# Altium PCB PCB_RX.PcbDoc
Units mil, origin at the board's own origin, x right, y up, seen from the top; angles counter-clockwise.
Board outline 3346.46 x 2149.63 mil, 2 copper layers (Top Layer, Bottom Layer); 88 components, 53 nets, 289 pads, 80 vias.
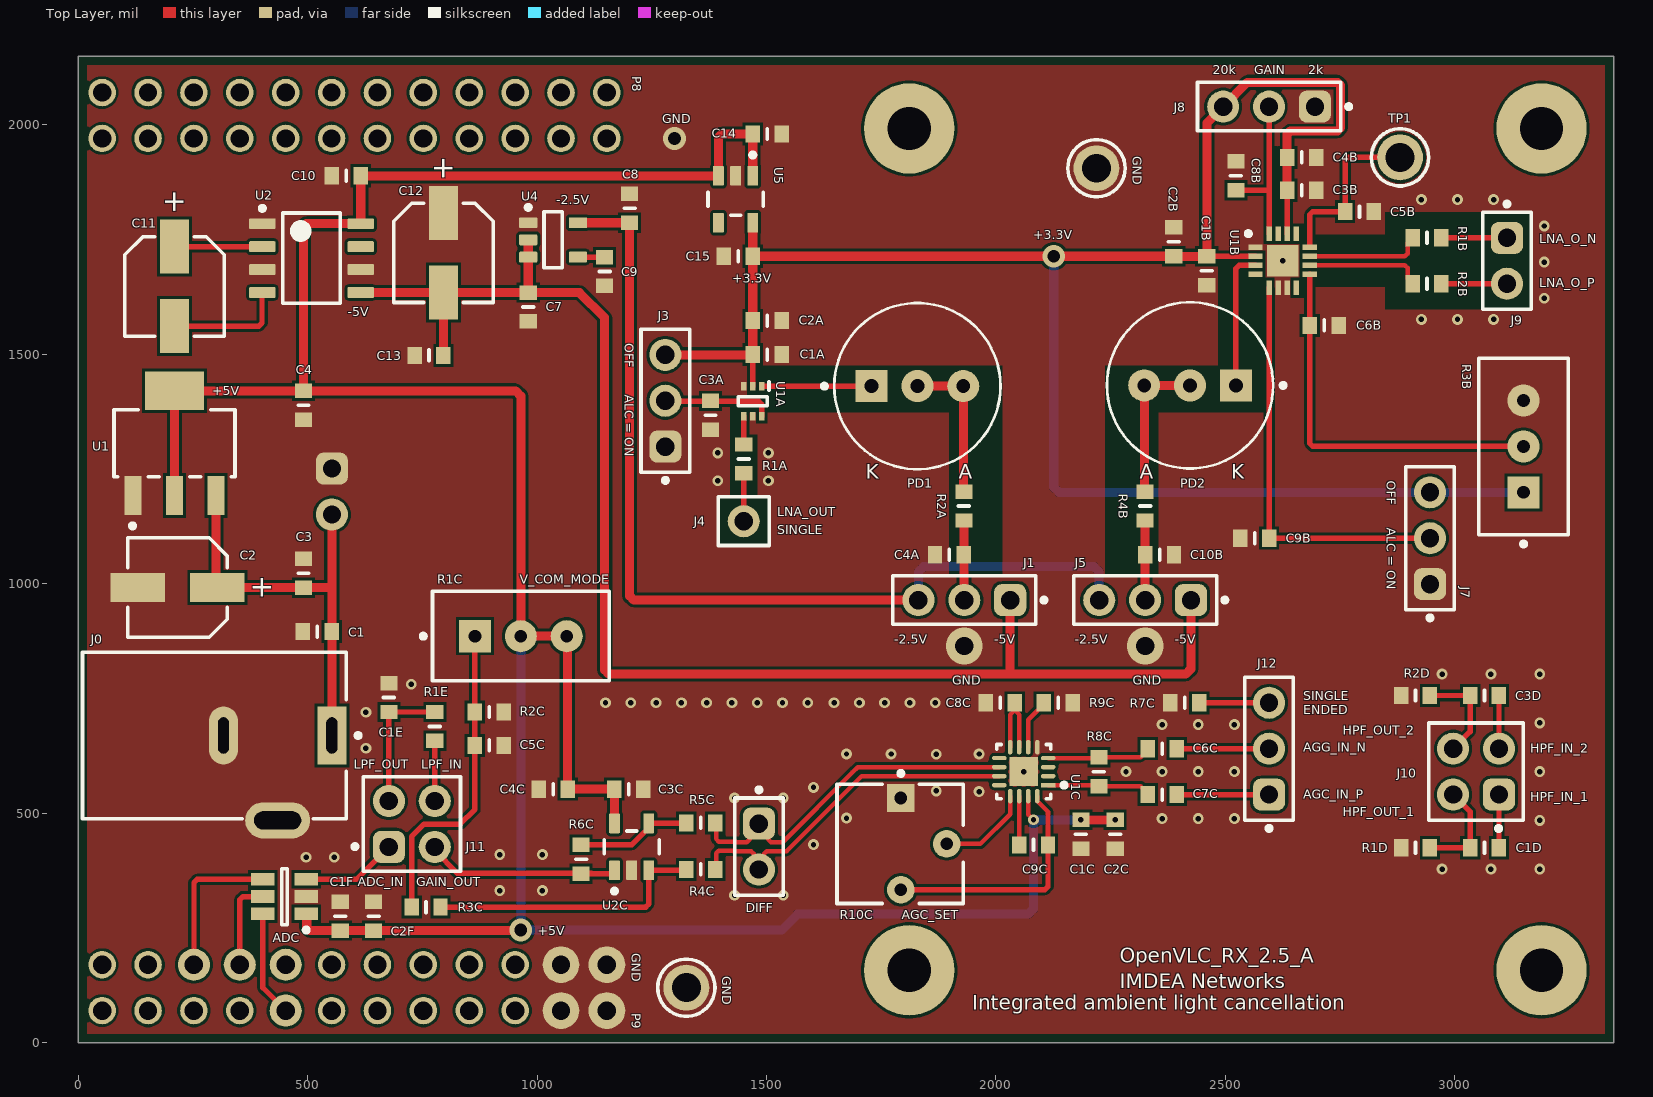
[diagram p0: Top Layer view]
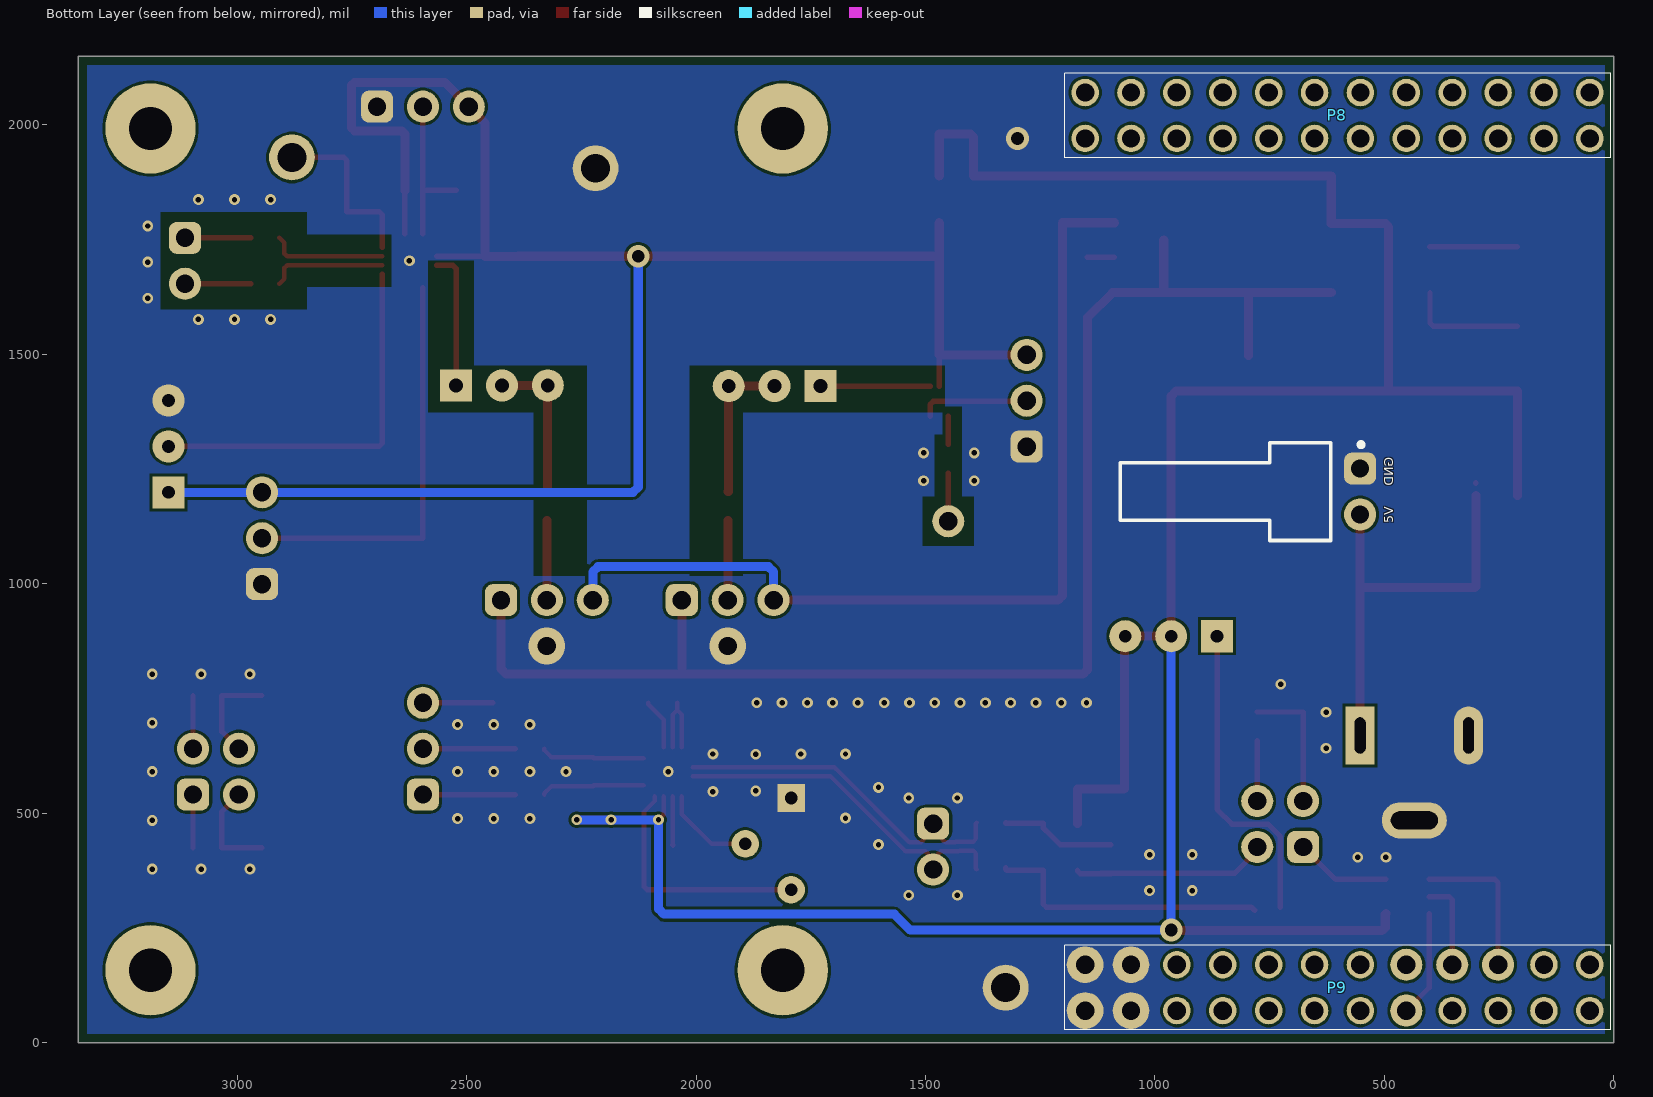
[diagram p1: Bottom Layer view, seen from below]

## Layer stack, top to bottom
Top Solder: solder mask 0.4, Solder Resist, Dk 3.5
Top Layer: signal copper 1.4
Dielectric1: dielectric 12.6, FR-4, Dk 4.8
Bottom Layer: signal copper 1.4
Bottom Solder: solder mask 0.4, Solder Resist, Dk 3.5

## Board outline
0,-0.02 3346.46,-0.02 3346.46,2149.61 0,2149.61

## Design rules (kind name [scope] priority, off if disabled: settings)
Clearance Clearance_1 [(InNet('GND') AND InComponent('DC-DC'))] p1: gap=19.68 ignorepadtopadclearanceinfootprint=FALSE except(0: Arc-Hole Track-Hole SMDPad-Hole THPad-Hole Via-Hole Fill-Hole Poly-Hole Region-Hole Text-Hole)
Clearance [All] p2: gap=5.91 ignorepadtopadclearanceinfootprint=FALSE except(0: Arc-Hole Track-Hole SMDPad-Hole THPad-Hole Via-Hole Fill-Hole Poly-Hole Region-Hole Text-Hole)
DiffPairsRouting [All] p1: maxlimit=11.81 minlimit=9.84 mostfreqgap=11.81 toplayer_prefgap=9.84 toplayer_minwidth=5.91 toplayer_maxwidth=15 toplayer_prefwidth=15 bottomlayer_minwidth=5.91 bottomlayer_maxwidth=15 bottomlayer_prefwidth=15 maxuncoupledlength=500
HoleSize [All] p1: absolutevalues=TRUE maxlimit=100 minlimit=9.84 maxpercent=80.000 minpercent=20.000
MinimumSolderMaskSliver [All] p1: minsoldermaskwidth=5.91
PlaneConnect [All] p1: planeconnectstyle=Direct reliefexpansion=20 reliefentries=4 reliefconductorwidth=10 reliefairgap=10
PolygonConnect PolygonConnect_1 [IsVia & InNet('GND')] p1: connectstyle=Direct reliefconductorwidth=10 reliefentries=4 polygonreliefangle="90 Angle" airgapwidth=0
PolygonConnect [All] p2: connectstyle=Direct reliefconductorwidth=10 reliefentries=4 polygonreliefangle="90 Angle" airgapwidth=10
RoutingVias [All] p1: holewidth=28 width=50 viastyle="Through Hole" minholewidth=984.25 minwidth=21.65 maxholewidth=28 maxwidth=50
SMDNeckDown [All] p1: percent=80.000
SilkToSilkClearance [All] p1: silktosilkclearance=5.91
SilkToSolderMaskClearance [IsPad] p1: minsilkscreentomaskgap=5.91 clearancetoexposedcopper=TRUE
SolderMaskExpansion [All] p1: expansion=4 istentingtop=FALSE
SupplyNets "Schematic Supply Nets_2" [InNet('+3.3V')] p1: voltage=0.000
SupplyNets "Schematic Supply Nets_6" [InNet('-5V')] p2: voltage=0.000
SupplyNets "Schematic Supply Nets_5" [InNet('-2.5V')] p3: voltage=0.000
SupplyNets "Schematic Supply Nets_3" [InNet('+5V')] p4: voltage=0.000
SupplyNets "Schematic Supply Nets_1" [InNet('VCC')] p5: voltage=0.000
SupplyNets "Schematic Supply Nets" [InNet('GND')] p6: voltage=0.000
Width [All] p1: maxlimit=39.37 minlimit=5.91 preferedwidth=11.81 minimp=50.000000 maximp=50.000000 favimp=50.000000
24 further rules are at their usual default settings.

## Classes and differential pairs
differential pair OUT2: +OUT2_P -OUT2_N
differential pair OUT1: +OUT1_P -OUT1_N

## Components (designator, comment, footprint, x,y, rotation, side; value= is the part's Value field where it differs from the comment)
5V "61900211021" 61900211021 -49153.94,-48799.21 r270 bottom
ADC "ADS7886SBDBVR" TI-DBV6_M 449.61,318.24 r180 top
C1 "Cap" RESC1608X55N 521.26,895.76 r180 top value=10uF
C1A "Cap" RESC1608X55N 1501.52,1499.27 r0 top value=100nF
C1B "Cap" RESC1608X55N 2459.47,1682.06 r270 top value=100nF
C1C "Cap" RESC1608X55N 2185.04,454.06 r270 top value=100nF
C1D "Cap" RESC1608X55N 3064.74,424.61 r180 top value=120nF
C1E "Cap" RESC1608X55N 677.1,751.97 r90 top value=620pF
C1F "Cap" RESC1608X55N 571.23,275.73 r90 top value=100nF
C2 "47uF" WCAP-PSLP_D5H5.5 216.54,991.63 r0 top
C2A "Cap" RESC1608X55N 1501.52,1573.33 r0 top value=2.2uF
C2B "Cap" RESC1608X55N 2387.47,1745.15 r90 top value=2.2uF
C2C "Cap" RESC1608X55N 2259.84,454.06 r270 top value=2.2uF
C2F "Cap" RESC1608X55N 643.85,275.73 r90 top value=2.2uF
C3 "Cap" RESC1608X55N 490.93,1023.13 r270 top value=2.2uF
C3A "Cap" RESC1608X55N 1377.95,1366.85 r270 top value=2.2uF
C3B "Cap" RESC1608X55N 2666.07,1857.45 r0 top value=100nF
C3C "Cap" RESC1608X55N 1199.98,552.2 r0 top value=100nF
C3D "Cap" RESC1608X55N 3064.74,756.42 r180 top value=120nF
C4 "Cap" RESC1608X55N 490.93,1388.92 r90 top value=10uF
C4A "Cap" RESC1608X55N 1898.65,1062.99 r0 top value=2.2uF
C4B "Cap" RESC1608X55N 2666.07,1929.07 r0 top value=2.2uF
C4C "Cap" RESC1608X55N 1035.63,552.2 r180 top value=2.2uF
C5B "Cap" RESC1608X55N 2792.29,1811.02 r180 top value=100nF
C5C "Cap" RESC1608X55N 896.06,647.56 r180 top value=2.2uF
C6B "Cap" RESC1608X55N 2715.28,1562.99 r0 top value=100nF
C6C "Cap" RESC1608X55N 2362.2,640.51 r180 top value=120nF
C7 "Cap" RESC1608X55N 980.75,1603.1 r90 top value=2.2uF
C7C "Cap" RESC1608X55N 2362.2,540.51 r180 top value=120nF
C8 "Cap" RESC1608X55N 1201.56,1818.18 r270 top value=10uF
C8B "Cap" RESC1608X55N 2523.04,1888.95 r90 top value=2.2uF
C8C "Cap" RESC1608X55N 2009.41,740.51 r0 top value=2.2uF
C9 "Cap" RESC1608X55N 1147.29,1680.38 r90 top value=100nF
C9B "Cap" RESC1608X55N 2563.71,1099.21 r180 top value=2.2uF
C9C "Cap" RESC1608X55N 2081.96,430.68 r0 top value=2.2uF
C10 "Cap" RESC1608X55N 584.25,1889.04 r0 top value=2.2uF
C10B "Cap" RESC1608X55N 2356.58,1062.99 r180 top value=2.2uF
C11 "47uF" WCAP-PSLP_D5H5.5 209.91,1647.98 r90 top
C12 "47uF" WCAP-PSLP_D5H5.5 795.94,1721.21 r90 top
C13 "Cap" RESC1608X55N 764.44,1497.68 r0 top value=10uF
C14 "GRM188R6YA475KE15D" RESC1608X55N 1501.52,1980.09 r180 top value=2.2uF
C15 "GRM188R6YA106MA73D" RESC1608X55N 1438.52,1713.66 r0 top value=10uF
DIFF "61300211121" 61300211121 1483.44,427.11 r270 top
GND "5011" KSTN-5011_V 2219.09,1905.51 r270 top
GND "5011" KSTN-5011_V 1325.27,119.72 r270 top
J0 "PJ-102A" FP-PJ-102A-MFG 296.85,669.29 r90 top
J1 "61300311121" 61300311121 1931.07,964.35 r180 top
J3 "61300311121" 61300311121 1279.53,1398.78 r90 top
J4 "61300111121" 61300111121 1450.34,1136.19 r0 top
J5 "61300311121" 61300311121 2325.08,964.35 r180 top
J7 "61300311121" 61300311121 2945.84,1099.21 r90 top
J8 "61300311121" 61300311121 2595.2,2039.73 r180 top
J9 "61300211121" 61300211121 3113.67,1703.82 r270 top
J10 "61300421121" 61300421121 3046.23,590.51 r90 top
J11 "61300421121" 61300421121 727.1,476.38 r0 top
J12 "61300311121" 61300311121 2595.2,640.51 r90 top
P8 "61302421121" BBB_CAPE_NO_HEADER_R_24#1 2252.13,1970.41 r0 bottom
P9 "61302421121" BBB_CAPE_NO_HEADER_R_24#2 2252.16,69.73 r0 bottom
PD1 "BPW21R" FP-6_511-5002_01-4-MFG 1828.82,1430.63 r180 top
PD2 "BPW21R" FP-6_511-5002_01-4-MFG 2423.04,1432.25 r0 top
R1A "Res1" RESC1608X55N 1450.34,1271.91 r90 top value=130
R1B "Res1" RESC1608X55N 2939.35,1753.82 r180 top value=130
R1C "500" FP-3296W-MFG 964.57,885.83 r270 top
R1D "Res1" RESC1608X55N 2914.35,424.61 r180 top value=130
R1E "Res1" RESC1608X55N 777.1,688.98 r270 top value=130
R2A "Res1" RESC1608X55N 1930.15,1169.29 r270 top value=2k
R2B "Res1" RESC1608X55N 2939.35,1653.82 r180 top value=130
R2C "Res1" RESC1608X55N 896.06,720.47 r0 top value=130
R2D "Res1" RESC1608X55N 2914.35,756.42 r180 top value=130
R3B "10k" FP-3296W-MFG 3149.61,1299.21 r0 top
R3C "Res1" RESC1608X55N 758.04,295.28 r180 top value=130
R4B "Res1" RESC1608X55N 2325.08,1169.29 r270 top value=2k
R4C "Res1" RESC1608X55N 1356.77,377.45 r0 top value=130
R5C "Res1" RESC1608X55N 1356.77,478.87 r0 top value=130
R6C "Res1" RESC1608X55N 1095.97,399.79 r90 top value=130
R7C "Res1" RESC1608X55N 2411.29,740.51 r180 top value=130
R8C "Res1" RESC1608X55N 2224.41,590.51 r270 top value=240
R9C "Res1" RESC1608X55N 2135.88,740.51 r180 top value=10k
R10C "10k" BOUR-3362P 1791.34,433.07 r270 top
TP1 "5010" KSTN-5010_V 2880.59,1929.07 r0 top
U1 "TLV76150DCYR" FP-DCY0004A-MFG 209.91,1306.24 r90 top
U1A "LMH34400IDRLR" SOTFL50P160X60-6N 1470.02,1397.64 r270 top
U1B "LMH32401IRGTR" QFN50P300X300X100-17N-D 2624.73,1703.82 r0 top
U1C "AD8338ACPZ-R7" FP-CP-16-22-IPC_C 2060.59,590.51 r180 top
U2 "LM2663M/NOPB" D0008A_N 508.46,1709.6 r0 top
U2C "OPA863ADBVR" FP-DBV0005A-MFG 1206.12,426.67 r90 top
U4 "TPS72325DBVR" DBV0005A_N 1034.88,1749.28 r0 top
U5 "TPS7A2433DBVR" FP-DBV0005A-MFG 1432.62,1837.86 r270 top

## Footprints (in the part's own frame and the unit in brackets; to place one, negate y for a bottom-side part, rotate by r counter-clockwise, add the part's x,y. Pads: shape width x height; smd on the part's side, far side on the other; paste and mask are expansions set on the pad)
61300111121 [mil] "Pin Header, pitch 2.54 mm, THT, Vertical, single row, 1p"
  round 70 hole 40: 1(0,0)
  silkscreen extent -56,-53 56,53, body extent -50,-50 50,50, height 337
61300211121 [mil] "Pin Header, pitch 2.54 mm, THT, Vertical, single row, 2p"
  rrect50% 70x70 hole 40: 1(-50,0)
  round 70 hole 40: 2(50,0)
  silkscreen extent -129,-53 106,53, body extent -100,-50 100,50, height 337
61300311121 [mil] "Pin Header, pitch 2.54 mm, THT, Vertical, single row, 3p"
  rrect50% 70x70 hole 40: 1(-100,0)
  round 70 hole 40: 2(0,0) 3(100,0)
  silkscreen extent -179,-53 156,53, body extent -150,-50 150,50, height 337
61300421121 [mil] "Pin Header, pitch 2.54 mm, THT, Vertical, dual row, 4p"
  rrect50% 70x70 hole 40: 1(-50,-50)
  round 70 hole 40: 2(-50,50) 3(50,-50) 4(50,50)
  silkscreen extent -129,-103 106,103, body extent -100,-100 100,100, height 338
61900211021 [mil] "2.54mm Male Left Angled Header Bottom Locking, 2p"
  rrect50% 70x70 hole 39.37: 1(-50050,-49706.69)
  round 70 hole 39.37: 2(-49950,-49706.69)
  silkscreen extent -50107,-50229 -49893,-49700, body extent -50100,-50226 -49900,-49694, height 230
BBB_CAPE_NO_HEADER_R_24#1 [mil] "46-pin male header for BeagleBone Black P8,P9"
  round 60 hole 40: 23(-1100,0) 24(-1100,-100) 25(-1200,0) 26(-1200,-100) 27(-1300,0) 28(-1300,-100) 29(-1400,0) 30(-1400,-100) 31(-1500,0) 32(-1500,-100) 33(-1600,0) 34(-1600,-100) 35(-1700,0) 36(-1700,-100) 37(-1800,0) 38(-1800,-100) 39(-1900,0) 40(-1900,-100) 41(-2000,0) 42(-2000,-100) 43(-2100,0) 44(-2100,-100) 45(-2200,0) 46(-2200,-100)
  silkscreen extent -2246,-142 -1056,42
BBB_CAPE_NO_HEADER_R_24#2 [mil] "46-pin male header for BeagleBone Black P8,P9"
  round 80 hole 40: 23(-1100,0) 24(-1100,-100) 25(-1200,0) 26(-1200,-100)
  round 60 hole 40: 27(-1300,0) 28(-1300,-100) 29(-1400,0) 30(-1400,-100) 31(-1500,0) 32(-1500,-100) 33(-1600,0) 34(-1600,-100) 35(-1700,0) 36(-1700,-100) 39(-1900,0) 41(-2000,0) 43(-2100,0) 44(-2100,-100) 45(-2200,0) 46(-2200,-100)
  round 70 hole 40: 37(-1800,0) 38(-1800,-100) 40(-1900,-100) 42(-2000,-100)
  silkscreen extent -2246,-142 -1056,42
BOUR-3362P [mil] "THD, 3-Leads, Body 6.6x6.99mm, Pitch 2.54mm"
  rect 60x60 hole 27.56 paste-99999 mask+0: 1(-100,1.38)
  round 60 hole 27.56 paste-99999 mask+0: 2(0,101.38) 3(100,1.38)
  silkscreen extent -158,-138 130,138, body extent -130,-138 130,138, height 195
D0008A_N [mm] "SOIC, 8-Leads, Body 5x4mm, Pitch 1.27mm, IPC Medium Density"
  rrect17% 1.45x0.6 smd: 1(-2.725,1.905) 2(-2.725,0.635) 3(-2.725,-0.635) 4(-2.725,-1.905) 5(2.725,-1.905) 6(2.725,-0.635) 7(2.725,0.635) 8(2.725,1.905)
  silkscreen extent -2.85,-2.5 1.6,2.88, body extent -3,-2.45 3,2.45, height 1.63
DBV0005A_N [mm] "SOT23, 5-Leads, Body 3.05x1.75mm, Pitch 0.95mm, IPC Medium Density"
  rrect17% 1x0.6 smd: 1(-1.375,0.95) 2(-1.375,0) 3(-1.375,-0.95) 4(1.375,-0.95) 5(1.375,0.95)
  silkscreen extent -1.5,-1.55 0.5,1.92, body extent -1.42,-1.46 1.42,1.46, height 1.08
FP-6_511-5002_01-4-MFG [mil]
  rect 70x70 hole 30 paste-99999 mask+0: 1(100,0)
  round 70 hole 30 paste-99999 mask+0: 2(-100,0)
  silkscreen extent -181,-181 208,181, body extent -185,-185 185,185, height 10
FP-3296W-MFG [mil]
  rect 70x70 hole 27.56 paste-99999 mask+0: 1(0.2,-100)
  round 70 hole 27.56 paste-99999 mask+0: 2(0.2,0) 3(0.2,100)
  silkscreen extent -98,-218 98,193, body extent -102,-196 102,196, height 10
FP-CP-16-22-IPC_C [mm]
  rect 0.806x0.239 smd paste+0 mask+0: 1(-1.353,0.75)
  rrect100% 0.806x0.239 smd paste+0 mask+0: 2(-1.353,0.25) 3(-1.353,-0.25) 4(-1.353,-0.75) 9(1.353,-0.75) 10(1.353,-0.25) 11(1.353,0.25) 12(1.353,0.75)
  rrect100% 0.239x0.806 smd paste+0 mask+0: 5(-0.75,-1.353) 6(-0.25,-1.353) 7(0.25,-1.353) 8(0.75,-1.353) 13(0.75,1.353) 14(0.25,1.353) 15(-0.25,1.353) 16(-0.75,1.353)
  rect 1.6x1.6 smd paste-1000 mask+0: 17(0,0)
  silkscreen extent -2.36,-1.5 1.5,1.5, body extent -1.86,-1.86 1.86,1.86, height 0.25
FP-DBV0005A-MFG [mm]
  rrect17% 1.1x0.6 smd paste+0 mask+0: 1(-1.3,0.95) 2(-1.3,0) 3(-1.3,-0.95) 4(1.3,-0.95) 5(1.3,0.95)
  silkscreen extent -2.57,-1.53 0.87,1.53, body extent -1.95,-1.78 1.95,1.78, height 0.25
FP-DCY0004A-MFG [mm]
  rect 2.15x0.95 smd paste+0 mask+0: 1(-2.9,2.3) 2(-2.9,0) 3(-2.9,-2.3)
  rect 2.15x3.25 smd paste+0 mask+0: 4(2.9,0)
  silkscreen extent -4.7,-3.35 1.85,3.35, body extent -4.08,-3.45 4.08,3.45, height 0.25
FP-PJ-102A-MFG [mm]
  rect 3.2x1.6 hole 0.6 slot 2 at 0 deg paste-2539.97 mask+0: 1(0,-6.5)
  rrect100% 3.2x1.6 hole 0.6 slot 2 at 0 deg paste-2539.97 mask+0: 2(0,-0.5)
  rrect100% 2x3.6 hole 2.6 slot 1 at 0 deg paste-2539.97 mask+0: 3(-4.7,-3.5)
  silkscreen extent -4.6,-8.08 4.6,7.3, body extent -5.6,-7.4 4.7,7.4, height 0.25
KSTN-5010_V [mm] "Test Point, Dia 3.17mm"
  round 2.54 hole 1.6: 1(0,0)
  silkscreen extent -1.59,-1.58 1.59,1.58, body extent -1.59,-1.59 1.59,1.59, height 8.13
KSTN-5011_V [mm] "Test Point, Dia 3.17mm"
  round 2.54 hole 1.6: 1(0,0)
  silkscreen extent -1.58,-1.59 1.58,1.59, body extent -1.59,-1.59 1.59,1.59, height 8.13
QFN50P300X300X100-17N-D [mm]
  rect 0.8x0.3 smd: 1(-1.5,0.75) 2(-1.5,0.25) 3(-1.5,-0.25) 4(-1.5,-0.75) 9(1.5,-0.75) 10(1.5,-0.25) 11(1.5,0.25) 12(1.5,0.75)
  rect 0.3x0.8 smd: 5(-0.75,-1.5) 6(-0.25,-1.5) 7(0.25,-1.5) 8(0.75,-1.5) 13(0.75,1.5) 14(0.25,1.5) 15(-0.25,1.5) 16(-0.75,1.5)
  rect 1.75x1.75 smd: 17(0,0)
  silkscreen extent -2.02,1.38 -1.77,1.62
RESC1608X55N [mm]
  rect 0.8x0.95 smd: 1(-0.8,0) 2(0.8,0)
  silkscreen extent 0,-0.3 0,0.3
SOTFL50P160X60-6N [mm]
  rect 0.475x0.3 smd: 1(-0.838,0.5) 2(-0.838,0) 3(-0.838,-0.5) 4(0.838,-0.5) 5(0.838,0) 6(0.838,0.5)
  silkscreen extent -1.07,-0.8 0.25,0.9
TI-DBV6_M [mm] "SOT23, 6-Leads, Body 2.9x1.6mm, Pitch 0.95mm, IPC Low Density"
  rect 1.3x0.7 smd: 1(-1.2,0.95) 2(-1.2,0) 3(-1.2,-0.95) 4(1.2,-0.95) 5(1.2,0) 6(1.2,0.95)
  silkscreen extent -1.33,-1.55 0.15,1.97, body extent -0.87,-1.52 0.87,1.53, height 1.45
WCAP-PSLP_D5H5.5 [mm] "Aluminum Polymer Capacitors, body diameter 5mm"
  rect 3x1.6 smd: 1(2.2,0) 2(-2.2,0)
  silkscreen extent -2.75,-2.75 2.75,2.75, body extent -3,-2.65 3,2.65, height 5.5

## Part data
5V: library part CMP-1502-00592-2, Color=Beige, Contact Resistance=20mΩ, Current Rating=3A, Flammability Rating="UL94 V-0", Insulation Resistance=1GΩ, Max Operating Temperature=105°C, Min Operating Temperature=-40°C, Operating Supply Voltage=250V, Connector Type="Male Pin", Contact Gender=Male, Contact Material=Copper, Contact Mating Length=7.62mm, Contact Plating=Tin, Fastening Type=Friction, Gender=Male, Height=3.2mm, Housing Material=Nylon, Insulation=Insulated, Lead Pitch=2.54mm, Length=5.08mm, Mount="Through Hole", NexarPartId=18818217, Number of Contacts=2, Number of Pins=2, Number of Positions=2, Number of Rows=1, Packaging=Bulk, Pitch=2.54mm, REACH SVHC=Unknown, RoHS=Compliant, Termination="Through Hole", Voltage Rating=250V, Width=5.12mm
ADC: library part CMP-0003-00246-2, "2.35 to 5.25 V, 12-Bit, 1 MSPS, Serial ADC, -40 to 125 degC, 6-pin SOT23 (DBV6), Green (RoHS & no Sb/Br)", Analog Voltage AV/DD(Max)(V)=5.25, Analog Voltage AV/DD(Min)(V)=2.35, Manufacturer="Texas Instruments", # Input Channels=1, Architecture=SAR, Code_JEDEC=MO-178, ComponentLink1Description="Manufacturer URL", ComponentLink1URL=http://www.ti.com/, ComponentLink2Description=Datasheet, ComponentLink2URL=http://www.ti.com/general/docs/lit/getliterature.tsp?genericPartNumber=ADS7886&fileType=pdf, ComponentLink3Description="Package Specification", ComponentLink3URL=http://www.ti.com/litv/pdf/mpds026h, DatasheetVersion=SLAS492A, Digital Supply(Max)(V)=5.25, Digital Supply(Min)(V)=2.35, Eco-Plan="Green (RoHS & no Sb/Br)", INL(Max)(+/-LSB)=1.25, Interface="Serial SPI", Mounting Technology="Surface Mount", PackageDescription="6-Pin Plastic Small Outline, Body 1.6 x 2.9 mm, Pitch 0.95 mm", PackageReference=DBV6, PackageVersion="4073253-5/K, 03/2006", PartNumber=ADS7886SBDBVR, Resolution(Bits)=12, Sample Rate (max)(SPS)=1M, SFDR(dB)=85.5, SINAD(dB)=71.25, SNR(dB)=71.25, SubFamily="Precision ADC (<=10MSPS)"
C1 C1A C1B C1C C1D C1E C1F C2A C2B C2C C2F C3 C3A C3B C3C C3D C4 C4A C4B C4C C5B C5C C6B C6C C7 C7C C8 C8B C8C C9 C9B C9C C10 C10B C13: "Capacitor", LatestRevisionDate=17-Jul-2002, LatestRevisionNote="Re-released for DXP Platform.", PackageDescription="Radial Cap, Thru-Hole; 2 Leads; 0.3 in Pin Spacing", PackageReference=RAD-0.3, Published=8-Jun-2000, Publisher="Altium Limited"
C2 C11 C12: library part CMP-03913-53758736-1, "875105242006 WCAP-PSLP Aluminum Polymer Capacitors", Capacitance=47µF, Case/Package=Radial, ESR (Equivalent Series Resistance)=30mΩ, Leakage Current=300µA, Max Operating Temperature=105°C, Min Operating Temperature=-55°C, Ripple Current=1.97A, Tolerance=20%, Voltage Rating=10V, Diameter=5mm, Height - Seated (Max)=5.5118mm, Length=5.5mm, Life (Hours)=2000hours, Mount="Surface Mount", NexarPartId=53758736, Packaging="Tape & Reel (TR)", Pitch=5.3mm, Polarity=Polar, REACH SVHC=Unknown, RoHS=Compliant, Voltage Rating (DC)=10V
C14 C15: library part Cap, "Capacitor", LatestRevisionDate=17-Jul-2002, LatestRevisionNote="Re-released for DXP Platform.", PackageDescription="Radial Cap, Thru-Hole; 2 Leads; 0.3 in Pin Spacing", PackageReference=RAD-0.3, Published=8-Jun-2000, Publisher="Altium Limited"
DIFF J9: library part CMP-1712-00002-6, Color=Black, Contact Resistance=20mΩ, Current Rating=3A, Max Operating Temperature=125°C, Min Operating Temperature=-40°C, Operating Supply Voltage=250V, Connector Type="Male Pin", Contact Gender=Male, Contact Material=Copper, Contact Mating Length=5.9944mm, Contact Plating=Gold, Gender=Male, Height=8.94mm, Housing Material=PBT, Lead Free="Lead Free", Lead Pitch=2.54mm, Mount="Through Hole", NexarPartId=20081794, Number of Contacts=2, Number of Pins=2, Number of Positions=2, Number of Rows=1, Orientation=Vertical, Packaging=Bulk, Pitch=2.54mm, REACH SVHC="No SVHC", RoHS=Compliant, Termination="Through Hole", Voltage Rating=250V
GND GND: library part CMP-1672-00003-4, "Test Point, Black, Through Hole, RoHS, Bulk", Colour=Black, Manufacturer=Keystone, Package Quantity=100, ComponentLink1Description="Manufacturer URL", ComponentLink1URL=http://www.keyelco.com/, ComponentLink2Description=Datasheet, ComponentLink2URL=http://www.keyelco.com/product-pdf.cfm?p=1320, Contact Material=Bronze, Contact Plating=Silver, DatasheetVersion="Rev. F, 12/2013", Height="8.12 mm", Mount="Through Hole", Mounting Technology="Through Hole", PackageDescription="1-Pin Through Hole Device, Dia 3.17 mm", PackageReference=5011, Packaging=Bulk, Pins=1, REACH SVHC="No SVHC", RoHSCompliant=true
J0: library part CMP-12637-106234071-1, "PJ-102A 2.0 x 6.5 mm, 2.5 A, Horizontal, Through Hole, Tapered Pins, Dc Power Jack Connector", Color=Black, Current Rating=2.5A, Flammability Rating="UL94 V-0", Insulation Resistance=50MΩ, Max Operating Temperature=85°C, Min Operating Temperature=-25°C, Voltage Rating=24V, Contact Gender=Male, Contact Material="Copper, Nickel, Tin", Contact Plating=Nickel, Diameter=2.1mm, Gender=Male, Height=11.2mm, Housing Color=Black, Housing Material=Thermoplastic, Inside Diameter=2mm, Lead Free="Lead Free", Lifecycle Status=Production, Mount="Through Hole", NexarPartId=106234071, Number of Conductors=2, Number of Contacts=3, Orientation=Horizontal, Outside Diameter=6.5mm, Packaging=Bulk, RoHS=Compliant, Schedule B="8536695050, 8536695050", Shielding=No, Termination="Through Hole", Voltage Rating (DC)=24V
J1 J3 J5 J7 J8 J12: library part CMP-1502-01062-3, Color=Black, Contact Resistance=20mΩ, Current Rating=3A, Max Operating Temperature=105°C, Min Operating Temperature=-40°C, Operating Supply Voltage=250V, Connector Type="Male Pin", Contact Material=Copper, Contact Mating Length=5.9944mm, Contact Plating=Gold, Gender=Male, Height=8.94mm, Lead Free="Lead Free", Lead Pitch=2.54mm, Mount="Through Hole", NexarPartId=32855521, Number of Contacts=3, Number of Pins=3, Number of Positions=3, Number of Rows=1, Orientation=Vertical, Packaging=Bulk, Pitch=2.54mm, REACH SVHC=Unknown, RoHS=Compliant, Termination=Solder, Voltage Rating=250V
J4: library part CMP-1502-01058-3, Color=Black, Contact Resistance=20mΩ, Current Rating=3A, Operating Supply Voltage=250V, Connector Type="Male Pin", Contact Material=Copper, Contact Mating Length=5.9944mm, Contact Plating=Gold, Gender=Male, Lead Pitch=2.54mm, Mount="Through Hole", NexarPartId=32855518, Number of Contacts=1, Number of Pins=1, Number of Positions=1, Number of Rows=1, Orientation=Vertical, Packaging=Bulk, REACH SVHC=Unknown, RoHS=Compliant, Termination=Solder
J10 J11: library part CMP-1502-01066-4, Color=Black, Contact Resistance=20mΩ, Current Rating=3A, Max Operating Temperature=105°C, Min Operating Temperature=-40°C, Operating Supply Voltage=250V, Connector Type="Male Pin", Contact Material=Copper, Contact Mating Length=5.9944mm, Contact Plating=Gold, Gender=Male, Height=8.89mm, Lead Free="Lead Free", Lead Pitch=2.54mm, Mount="Through Hole", NexarPartId=32855524, Number of Contacts=4, Number of Pins=4, Number of Positions=4, Number of Rows=2, Orientation=Vertical, Packaging=Bulk, Pitch=2.54mm, REACH SVHC=Unknown, RoHS=Compliant, Row Spacing=2.54mm, Termination=Solder, Voltage Rating=250V
P8: library part BBB_P8_reduced
P9: library part BBB_P9_reduced
PD1 PD2: library part CMP-2000-05428-2, "SENSOR PHOTODIODE 565NM RADIAL", Ambient Temperature Range High=+125°C, Ambient Temperature Range Low=-40°C, Dark Current=0.002uA, Forward Current=50mA, Forward Voltage=1V, Manufacturer=Vishay, Package=6.511-5002.01-4, Power Dissipation=300mW, Reverse Breakdown Voltage=10V, Temperature="-40°C to +125°C", Automotive=No, Category=Diode, ComponentLink2Description=Datasheet, ComponentLink2URL=http://www.vishay.com/docs/81519/bpw21r.pdf, Device Class L1=Sensors, Device Class L2="Optical Sensors", Device Class L3=Photodiodes, Digikey Description="SENSOR PHOTODIODE 565NM RADIAL", Height=3.3mm, Lead Free=Yes, Manufacturer Part Number=BPW21R, Max Junction Temp=+125°C, Mouser Description="Photodiodes 50 Degree 300mW", Octopart=https://octopart.com/bpw21r-vishay-39390634, Response Time=3.1us, RoHS=TRUE, Sensor Output=Photodiode, Temperature Range High=+125°C, Temperature Range Low=-40°C, Viewing Angle=100°, Wavelength=565nm
R1A R1B R1D R1E R2A R2B R2C R2D R3C R4B R4C R5C R6C R7C R8C R9C: "Resistor", LatestRevisionDate=17-Jul-2002, LatestRevisionNote="Re-released for DXP Platform.", PackageDescription="Axial Device, Thru-Hole; 2 Leads; 0.3 in Pin Spacing", PackageReference=AXIAL-0.3, Published=8-Jun-2000, Publisher="Altium Limited"
R1C R3B: library part CMP-1747-00001-8, "TRIMMER 10K OHM 0.5W PC PIN TOP", Color=Blue, Insulation Resistance=1GR, Max Operating Temperature=125°C, Max Power Dissipation=500mW, Min Operating Temperature=-55°C, Package Quantity=50, Resistance=10kR, Resistance Tolerance=10%, Resistor Type=Cermet, Temperature Coefficient=100ppm/°C, Contact Plating=Tin, Depth=4.83mm, Height=11.55mm, Lead Free="Lead Free", Length=9.53mm, Military Standard=Not, Mount="Through Hole", Number of Turns=25, Packaging=Rail/Tube, Power Rating=500mW, Radiation Hardening=No, Reach SVHC Compliant=Yes, RoHS Compliant=Yes, Series=3296, Taper=Linear, Technology=CERMET, Termination=Pin, Tolerance=10%, Weight=0.03oz, Width=9.53mm
R10C: library part CMP-1747-00004-1, "Square Trimpot(R) Trimming Potentiometer, 10 KOhm, 300 V, -55 to 125 degC, 3-Pin THD, RoHS, Tube", Case Code (Imperial)=0612, Case Code (Metric)=1632, Case/Package=1206, Max Operating Temperature=125degC, Min Operating Temperature=-25degC, Package Quantity=5000, Power Rating="1 W", Resistance="50 mohm", Tolerance=1%, Voltage Rating="220 mV", ComponentLink1Description="Manufacturer URL", ComponentLink1URL=http://www.bourns.com/, ComponentLink2Description=Datasheet, ComponentLink2URL=http://www.bourns.com/docs/Product-Datasheets/3362.pdf, DatasheetVersion=May-16, Height="0.6 mm", Length="3.2 mm", Mount="Surface Mount", PackageDescription="3-Pin Through Hole Device, Body 6.6 x 6.99 mm, Pitch 2.54 mm", PackageReference=3326P, Packaging="Tape and Reel", Pins=2, REACH SVHC="No SVHC", RoHSCompliant=True, Width="1.6 mm"
TP1: library part CMP-1672-00002-4, "Test Point, Red, Through Hole, RoHS, Bulk", Colour=Red, Manufacturer=Keystone, Package Quantity=100, ComponentLink1Description="Manufacturer URL", ComponentLink1URL=http://www.keyelco.com/, ComponentLink2Description=Datasheet, ComponentLink2URL=http://www.keyelco.com/product-pdf.cfm?p=1319, Contact Material=Bronze, Contact Plating=Silver, DatasheetVersion="Rev. F, 12/2013", Height="8.12 mm", Mount="Through Hole", Mounting Technology="Through Hole", PackageDescription="1-Pin Through Hole Device, Dia 3.17 mm", PackageReference=5010, Packaging=Bulk, Pins=1, REACH SVHC="No SVHC", RoHSCompliant=true
U1: library part CMP-00370-134324849-1, "TLV76150DCYR 1-A 16-V high-PSRR linear voltage regulator 4-SOT-223 -40 to 125", Case/Package=SOT-223, Dropout Voltage=900mV, Manufacturer Lifecycle Status=ACTIVE, Max Junction Temperature (Tj)=125°C, Max Supply Voltage=16V, Min Operating Temperature=-40°C, Min Supply Voltage=6.5V, Nominal Supply Current=65µA, Output Current=1A, Output Voltage=5V, Accuracy=1%, Height=1.8mm, Length=6.5mm, Lifecycle Status=Production, Max Operating Temperature=125°C, NexarPartId=134324849, Number of Channels=1, Number of Outputs=1, Number of Pins=4, Thickness=1.6mm, Width=3.5mm
U1A: "240-MHz, single-ended, transimpedance amplifier with integrated clamp and ambient light cancellation", Manufacturer_Name="Texas Instruments", Mouser Part Number=595-LMH34400IDRLR, Datasheet Link=https://www.ti.com/lit/gpn/LMH34400, Geometry.Height=0.6mm, Manufacturer_Part_Number=LMH34400IDRLR, Mouser Price/Stock=https://www.mouser.co.uk/ProductDetail/Texas-Instruments/LMH34400IDRLR?qs=By6Nw2ByBD2lP2c%252BklzHtA%3D%3D
U1B: "Transimpedance Amplifiers Programmable gain, differential output high-speed transimpedance amplifier 16-VQFN -40 to 125", Manufacturer_Name="Texas Instruments", Mouser Part Number=595-LMH32401IRGTR, Arrow Part Number=LMH32401IRGTR, Arrow Price/Stock=https://www.arrow.com/en/products/lmh32401irgtr/texas-instruments?region=nac, Datasheet Link=https://www.ti.com/lit/ds/symlink/lmh32401.pdf?ts=1646040631678&ref_url=https%253A%252F%252Fwww.ti.com%252Fstore%252Fti%252Fen%252Fp%252Fproduct%252F%253Fp%253DLMH32401IRGTR, Geometry.Height=1mm, Manufacturer_Part_Number=LMH32401IRGTR, Mouser Price/Stock=https://www.mouser.co.uk/ProductDetail/Texas-Instruments/LMH32401IRGTR?qs=Cb2nCFKsA8pHSvnjXGe4%252BA%3D%3D
U1C: library part CMP-09116-000032-1, "IC OPAMP VGA 1 CIRCUIT 16LFCSP", Manufacturer="Analog Devices", Max Junction Temp=+150°C, Max Supply Voltage=5V, Min Supply Voltage=3V, Nominal Supply Current=3-6mA, Output Current per Channel=5mA, Package=CP-16-22, Temperature="-40°C to +85°C", Temperature Range High=+85°C, Temperature Range Low=-40°C, Voltage Gain=80dB, Automotive=No, Bandwidth=18MHz, Category=IC, ComponentLink2Description=Datasheet, ComponentLink2URL=https://www.analog.com/media/en/technical-documentation/data-sheets/AD8338.pdf, Device Class L1="Integrated Circuits (ICs)", Device Class L2="Linear ICs", Device Class L3="Amplifiers - Op Amps", Digikey Description="IC OPAMP VGA 1 CIRCUIT 16LFCSP", Height=0.8mm, Ipc Land Pattern Name=QFN50P300X300X75-16, Lead Free=Yes, Manufacturer Part Number=AD8338ACPZ-R7, Mouser Description="Special Purpose Amplifiers Ultra Low Pwr 18MHz SGL CH VGA", Number of Channels=1, Octopart=https://octopart.com/ad8338acpz-r7-analog+devices-21054770, RoHS=TRUE
U2: library part CMP-0065-00037-3, "Switched Capacitor Voltage Converter, 8-pin Narrow SOIC, Pb-Free", Manufacturer="Texas Instruments", PackageTopMarking=NSZXTT*LM26*63M, PowerWise=N, Code_IPC=SOIC127P600-8, Code_JEDEC=MS-012-AA, ComponentLink1Description="Datasheet URL", ComponentLink1URL=http://www.ti.com/general/docs/lit/getliterature.tsp?genericPartNumber=LM2663&fileType=pdf, CompType="Switch Caps", PackageDescription="SOIC Narrow, 4.9 x 3.9 x 1.45mm, 8 Lead, 1.27mm Pitch", PackageReference=D0008A, PinCount=8, RoHS=Y
U2C: library part CMP-00370-145533195-1, "OPA863ADBVR Single-channel, high-precision, low-power, 105-MHz, 12-V RRIO voltage-feedback amplifier 5-SOT-23 -40 to 125", Ambient Temperature Range High=125°C, Case/Package=SOT-23, Input Bias Current=300nA, Input Offset Voltage (Vos)=10µV, Manufacturer Lifecycle Status=ACTIVE, Max Junction Temperature (Tj)=150°C, Max Supply Voltage=12.6V, Min Operating Temperature=-40°C, Min Supply Voltage=2.7V, Nominal Supply Current=800µA, Output Current per Channel=30mA, Voltage Gain=128dB, Bandwidth=105MHz, Height=1.45mm, Length=2.9mm, Lifecycle Status=Production, Max Operating Temperature=125°C, NexarPartId=145533195, Number of Channels=1, Number of Pins=5, Response Time=70ns, Thickness=1.2mm, Width=1.6mm
U4: library part CMP-0394-00292-2, "Single Output High PSRR LDO, 200 mA, Fixed -2.5 V Output, -10 to -2.7 V Input, 5-pin SOT-23 (DBV), -40 to 125 degC, Green (RoHS & no Sb/Br)", Manufacturer="Texas Instruments", Accuracy(%)=2, Code_JEDEC=MO-178, ComponentLink1Description="Manufacturer URL", ComponentLink1URL=http://www.ti.com/, ComponentLink2Description=Datasheet, ComponentLink2URL=http://www.ti.com/general/docs/lit/getliterature.tsp?genericPartNumber=TPS72325&fileType=pdf, ComponentLink3Description="Package Specification", ComponentLink3URL=http://www.ti.com/litv/pdf/mpds018i, DatasheetVersion=SLVS346B, Eco-Plan="Green (RoHS & no Sb/Br)", Fixed Output Options(V)=-2.5, Iout(Max)(A)=0.2, Iq(Typ)(mA)=0.13, Mounting Technology="Surface Mount", PackageDescription="5-Pin Plastic Small Outline, Body 1.60 Ãƒâ€” 2.90 mm, Pitch 0.95 mm", PackageReference=DBV0005A, PackageVersion=4073253-4/K, PartNumber=TPS72325DBVR, SubFamily="Single Channel LDO", Vdo(Typ)(mV)=280, Vin(Max)(V)=-2.7, Vin(Min)(V)=-10, Vout Adj(Max)(V)=-2.5, Vout Adj(Min)(V)=-2.5
U5: library part CMP-00370-106221451-1, "TPS7A2433DBVR 200-mA, 18-V, ultra-low-IQ, low-dropout (LDO) voltage regulator with enable ; 5-SOT-23 -40 to 125", Case/Package=SOT-23, Manufacturer Lifecycle Status=ACTIVE, Output Voltage=3.3V, Height=1.45mm, Length=2.9mm, Lifecycle Status=Production, NexarPartId=106221451, Number of Channels=1, Number of Pins=5, Thickness=1.2mm, Width=1.6mm

## Free pads (board coordinates)
  round 196.85 hole 94.49: 3(1811.02,157.46) 3(1811.02,1992.13) 3(3188.98,157.46) 3(3188.98,1992.13)

## Via types
v1: diameter 23.62, hole 11.81, Top Layer to Bottom Layer, 73 vias
v2: diameter 50, hole 27.99, Top Layer to Bottom Layer, 3 vias
v3: diameter 80, hole 40, Top Layer to Bottom Layer, 2 vias
v4: diameter 70, hole 30, Top Layer to Bottom Layer, 2 vias

## Nets (pads, with @x,y where several pads share a name; then routed paths per layer and width w, separated by ;. In a path a pad name is that pad's centre, name@x,y a point inside that pad or via, vN(x,y) a via of type N, cw(c..) or ccw(c..) an arc to the next point about the centre after c; other vN are vias at no path point)
+3.3V: C1A.1 C1B.1 C2A.1 C2B.1 C3B.1 C4B.1 C15.2 J3.3 J7.3 J8.3 R3B.1 U1A.2 U1B.2 U1B.14 U5.5 | length 4210.9
  Top Layer w11.81: C1A.1@1469.53,1498.78 C1A.1 U1A.2 ; C2B.1 C2B.1@2387.52,1713.61 ; C1B.1 C1B.1 2555.73,1713.55 2555.83,1713.66 U1B.2 ; U1B.14 C3B.1
  Top Layer w19.68: J3.3@1294.58,1498.78 C1A.1@1469.53,1498.78 ; C1A.1 C2A.1 C15.2 ; U5.5 C15.2 ; C2B.1 v2(2125.98,1713.66) C15.2 ; C2B.1@2387.52,1713.61 C1B.1 ; C1B.1 2459.47,2004 J8.3 2548.15,2092.68 2744.19,2092.68 2751.11,2085.77 2751.11,1993.7 2744.19,1986.78 2641.49,1986.78 2634.57,1979.86 C4B.1 C3B.1
  Bottom Layer w19.68: v2@2125.98,1712.59 2125.98,1210.74 2137.52,1199.21 J7.3 R3B.1
+5V: ADC.1 C1C.1 C1F.1 C2C.1 C2F.1 C3C.1 C4.2 C4C.1 C10.2 C14.2 R1C.2 R1C.3 U1.2 U1.4 U1C.15 U2.8 U2C.5 U5.1 U5.3 | length 6522.7
  Top Layer w9.84: U1C.15 2070.44,496.91 v1(2081.78,485.56)
  Top Layer w19.68: U1.2 U1.4 C4.2 ; ADC.1 498.06,279.63 498.06,251.15 504.98,244.23 C1F.1 C2F.1 643.97,244.11 v2@964.45,244.11 ; C10.2@615.75,1887.32 U2.8 497.85,1784.6 490.93,1777.68 C4.2 ; C10.2 U5.3 1395.22,1973.17 1402.14,1980.09 C14.2 U5.1 ; R1C.2 964.57,1408.89 953.04,1420.42 C4.2 ; R1C.2@964.57,885.83 R1C.3@1064.57,885.83 ; R1C.3 1065.85,884.35 1065.85,553.48 C4C.1 C3C.1 1168.6,552.08 1168.6,477.96 U2C.5 U2C.5@1168.5,477.63 ; v1(2185.04,485.56) v1(2259.84,485.55)
  Bottom Layer w19.68: v2(964.45,245.17) 1533.19,245.17 1567.79,279.77 2070.25,279.77 2081.78,291.31 v1(2081.78,485.56) v1(2185.04,485.56) v1(2259.84,485.55) ; v2@964.57,243.99 R1C.2
-2.5V: C8.2 J1.3 J5.3 U4.5 | length 2086.7
  Top Layer w19.68: U4.5@1088.02,1786.68 C8.2 1201.56,973.5 1210.72,964.33 J1.3
  Bottom Layer w19.68: J1.3 1831.07,1025.91 1842.6,1037.45 2213.55,1037.45 2225.08,1025.91 J5.3
-5V: C7.2 C12.2 C13.2 J1.1 J5.1 U2.5 U4.2 U4.3 | length 3171
  Top Layer w11.81: 2031.07,803.13 2031.2,803
  Top Layer w19.68: U2.5 C12.2 ; C13.2 C12.2 ; U4.2 U4.3 C7.2 ; 2031.07,803.13 J1.1 ; J5.1 2425.08,814.53 2413.55,803 2031.2,803 1156.45,803 1147.29,812.16 1147.29,1579.7 1092.4,1634.6 C7.2 ; C12.2 C7.2
ADC_IN: ADC.3 J11.1 | length 209.6
  Top Layer w11.81: ADC.3 606.37,355.65 J11.1
CS_PD: ADC.6 P9.37 | length 231.7
  Top Layer w11.81: ADC.6 402.36,119.52 P9.37
GAIN_OUT: J11.3 R6C.1 U2C.1 | length 437.2
  Top Layer w11.81: J11.3@777.1,418.14 826.44,368.8 1118.11,368.8 ; R6C.1@1096.66,368.3 1162.81,368.3 1168.72,374.2 U2C.1
GND: 5V.1 ADC.2 C1.2 C1A.2 C1B.2 C1C.2 C1E.2 C1F.2 C2.2 C2A.2 C2B.2 C2C.2 C2F.2 C3.1 C3A.2 C3B.2 C3C.2 C4.1 C4A.1 C4B.2 C4C.2 C5B.1 C5C.1 C6B.2 C7.1 C8.1 C8B.2 C8C.1 C9.1 C9B.2 C10.1 C10B.1 C12.1 C13.1 C14.1 C15.1 GND.1 J0.2 J0.3 J3.1 J7.1 J8.1 P9.23 P9.24 P9.25 P9.26 R1D.2 R2C.2 R2D.2 R3B.3 R7C.2 R9C.1 R10C.1 U1.1 U1A.3 U1A.5 U1B.1 U1B.6 U1B.7 U1B.17 U1C.5 U1C.17 U2.1 U2.3 U2.6 U2C.2 U4.1 U5.2
  other v1: 1430.48,321.22 1536.39,321.2 918.78,331.32 1011.5,331.32 2972.44,377.95 3078.74,377.95 3185.04,377.95 496.78,403.88 557.99,403.88 918.78,409.81 1011.5,409.81 1602.36,431.41 3185.04,484.25 2362.2,488.15 2440.94,488.15 2519.68,488.15 1674.28,489.27 1430.55,533.03 1536.39,533.01 1963.43,547.01 1870.08,548.48 1602.36,556.02 2060.59,590.51 2283.46,590.51 2362.2,590.51 2440.94,590.51 2519.68,590.51 3185.04,590.55 1674.28,628.9 1771.65,628.9 1870.08,628.4 1963.43,628.9 626.96,641.5 2362.2,692.87 2440.94,692.87 2519.68,692.87 3185.04,696.85 626.96,719.89 1149.06,740.52 1204.18,740.52 1259.29,740.52 1314.41,740.52 1369.53,740.52 1424.65,740.52 1479.77,740.52 1534.88,740.52 1590,740.52 1647.2,740.52 1702.32,740.51 1757.44,740.51 1812.56,740.51 1867.68,740.51 725.94,780.99 2972.44,803.15 3078.74,803.15 3185.04,803.15 1393.7,1224.48 1504.06,1224.48 1393.7,1285.19 1504.06,1285.19 2927.17,1576.17 3005.91,1576.17 3084.65,1576.17 3194.8,1622.05 3194.8,1700.79 2624.73,1703.82 3194.8,1779.53 2927.17,1837.02 3005.91,1837.02 3084.65,1837.02
  other v2: 1299.21,1970.42
  other v3: 1931.07,864.35 2325.08,864.35
HPF_IN1: C1D.1 J10.1 | length 115.9
  Top Layer w11.81: C1D.1 J10.1
HPF_IN2: C3D.1 J10.3 | length 115.9
  Top Layer w11.81: J10.3 C3D.1
HPF_OUT1: C1D.2 J10.2 R1D.1 | length 218.6
  Top Layer w11.81: R1D.1 C1D.2 3033.24,503.5 J10.2
HPF_OUT2: C3D.2 J10.4 R2D.1 | length 218.6
  Top Layer w11.81: R2D.1 C3D.2 3033.24,677.52 J10.4
LPF_IN: J11.4 R1E.2 | length 131.1
  Top Layer w11.81: J11.4 R1E.2
LPF_OUT: C1E.1 J11.2 R1E.1 | length 294.1
  Top Layer w11.81: J11.2 C1E.1 R1E.1
MISO_PD: ADC.5 P9.40 | length 194.5
  Top Layer w11.81: P9.40 352.37,169.94 352.37,311.33 359.29,318.24 ADC.5
MODE: R9C.2 U1C.6 | length 110.8
  Top Layer w9.84: U1C.6 2070.44,703.61 2104.38,737.56 R9C.2
MOSI_PD: ADC.4 P9.42 | length 332
  Top Layer w11.81: P9.42 252.33,169.9 252.33,348.73 259.25,355.65 ADC.4
NetC3A_1: C3A.1 J3.2 U1A.6 | length 224.5
  Top Layer w11.81: J3.2@1294.58,1398.78 1295.81,1397.55 1482.79,1397.55 1489.71,1390.63 U1A.6
NetC4A_2: C4A.2 J1.2 R2A.2 | length 173.8
  Top Layer w19.68: R2A.2 C4A.2 1930.61,1062.53 1930.61,964.81 J1.2
NetC5B_2: C5B.2 TP1.1 U1B.12 | length 384.4
  Top Layer w11.81: U1B.12 2683.78,1804.1 2690.7,1811.02 C5B.2 2760.79,1922.15 2767.71,1929.07 TP1.1
NetC5C_2: C5C.2 R1C.1 R2C.1 R3C.2 | length 693.8
  Top Layer w11.81: R3C.2 726.54,448.89 753.53,475.88 832.51,475.88 864.57,507.94 R1C.1
NetC6B_1: C6B.1 R3B.2 U1B.9 | length 840.1
  Top Layer w11.81: C6B.1@2683.78,1560.04 C6B.1 2683.78,1306.13 2690.7,1299.21 R3B.2 ; C6B.1@2683.78,1562.91 U1B.9
NetC6C_1: C6C.1 J12.2 | length 201.5
  Top Layer w11.81: C6C.1 J12.2
NetC6C_2: C6C.2 R8C.1 U1C.4 | length 227.1
  Top Layer w9.84: U1C.4 2222.44,620.04 R8C.1 2315.16,622.01 2330.71,637.56 C6C.2
NetC7C_1: C7C.1 J12.1 | length 201.5
  Top Layer w11.81: C7C.1 J12.1
NetC7C_2: C7C.2 R8C.2 U1C.1 | length 227.1
  Top Layer w9.84: U1C.1 2222.44,560.98 R8C.2 2315.16,559.02 2330.71,543.46 C7C.2
NetC8B_1: C8B.1 J8.2 U1B.16 | length 350
  Top Layer w11.81: C8B.1 2592.86,1857.45 2595.2,1859.79 ; U1B.16 2595.2,1859.79 ; J8.2 2595.2,1859.79
NetC8C_2: C8C.2 U1C.7 U1C.8 | length 185.9
  Top Layer w9.84: U1C.8 2031.07,714.92 C8C.2@2040.91,724.76 ; C8C.2 C8C.2@2040.91,724.76 ; U1C.7 2050.75,714.92 C8C.2@2040.91,724.76
NetC9_2: C9.2 U4.4 | length 58.3
  Top Layer w11.81: U4.4 C9.2
NetC9B_1: C9B.1 J7.2 U1B.5 | length 896.2
  Top Layer w11.81: U1B.5 C9B.1 J7.2
NetC10B_2: C10B.2 J5.2 R4B.2 | length 173.4
  Top Layer w19.68: J5.2 R4B.2
NetC11_1: C11.1 U2.2 | length 191.3
  Top Layer w11.81: C11.1 U2.2
NetC11_2: C11.2 U2.4 | length 259.9
  Top Layer w11.81: C11.2 393.67,1561.37 400.59,1568.29 U2.4@400.59,1634.6
NetJ4_1: J4.1 R1A.1 | length 104.2
  Top Layer w11.81: J4.1 R1A.1
NetJ9_1: J9.1 R1B.1 | length 142.8
  Top Layer w11.81: R1B.1 J9.1
NetJ9_2: J9.2 R2B.1 | length 142.8
  Top Layer w11.81: R2B.1 J9.2
NetJ12_3: J12.3 R7C.1 | length 152.4
  Top Layer w11.81: R7C.1 J12.3
NetPD1_1: PD1.1 U1A.1 | length 239.1
  Top Layer w11.81: U1A.1 PD1.1
NetPD1_2: PD1.2 R2A.1 | length 330.4
  Top Layer w19.68: v4(1828.82,1430.63) PD1.2 1929.48,1429.96 1929.48,1201.45 R2A.1
NetPD2_1: PD2.1 U1B.3 | length 300.3
  Top Layer w11.81: PD2.1 2523.04,1687.04 2529.97,1693.97 U1B.3
NetPD2_2: PD2.2 R4B.1 | length 332.3
  Top Layer w19.68: R4B.1 2324.06,1201.81 2324.06,1431.23 PD2.2 v4(2423.04,1432.25)
NetR1A_2: R1A.2 U1A.4 | length 61.2
  Top Layer w11.81: R1A.2 U1A.4
NetR3C_1: R3C.1 R4C.1 U2C.3 | length 622.9
  Top Layer w11.81: R3C.1@782.62,288.36 R3C.1 1236.6,295.28 1243.52,302.19 U2C.3 1323.3,375.48 R4C.1 ; R4C.1@1324.98,380.55 R4C.1@1325.27,380.84
NetR5C_1: R5C.1 R6C.2 U2C.4 | length 254.8
  Top Layer w11.81: R6C.2 1206.78,431.29 U2C.4@1237.59,462.1 ; U2C.4@1237.62,462.1 1243.52,468 U2C.4 1324.25,477.85 R5C.1
OFSN: C9C.1 U1C.14 | length 107
  Top Layer w9.84: C9C.1 2050.75,430.96 U1C.14
  Top Layer w11.81: C9C.1@2050.27,430.48 C9C.1
OUT1_N: R1B.2 U1B.11 | length 254.5
  Top Layer w9.84: U1B.11 2776.41,1713.66 2891.26,1713.66 2897.03,1719.43 2897.03,1742.99 R1B.2
OUT1_P: R2B.2 U1B.10 | length 254.5
  Top Layer w9.84: U1B.10 2891.26,1693.97 2897.03,1688.21 2897.03,1664.65 R2B.2
OUT2_N: DIFF.1 R5C.2 U1C.10 | length 773.1
  Top Layer w9.84: R5C.2 1390.02,477.11 1390.02,443.77 1395.79,438 1434.51,438 1435.57,436.95 1457.1,436.95 1463.54,443.39 1463.54,457.22 DIFF.1 1503.33,457.22 1503.33,443.39 1509.77,436.95 1535.5,436.95 1687.37,588.82 1698.9,600.35 U1C.10
OUT2_P: DIFF.2 R4C.2 U1C.11 | length 783.9
  Top Layer w9.84: R4C.2 1390.02,379.21 1390.02,412.55 1395.79,418.32 1426.36,418.32 1427.41,417.26 1466.33,417.26 1473.27,410.32 1473.27,387.28 DIFF.2 1493.6,387.28 1493.6,410.32 1500.55,417.26 1543.65,417.26 1707.05,580.67 U1C.11
PS_ON: P9.44
VAGC: R10C.2 U1C.13 | length 204.6
  Top Layer w9.84: R10C.2 1966.27,433.07 2031.07,497.87 U1C.13
VCC: 5V.2 C1.1 C2.1 C3.2 J0.1 U1.3 | length 933.9
  Top Layer w11.81: U1.3@300.35,1220.13 U1.3@301.17,1219.31
  Top Layer w19.68: U1.3 300.46,994.32 C2.1 552.53,991.63 552.76,991.86 ; J0.1 552.76,991.86 ; 5V.2 552.76,991.86
VREF: C9C.2 R10C.3 U1C.16 | length 530.5
  Top Layer w9.84: U1C.16 2090.12,526.51 2113.46,503.17 C9C.2
  Top Layer w11.81: R10C.3 2106.54,333.07 2113.46,339.99 C9C.2
pads on no net: P8.23 P8.24 P8.25 P8.26 P8.27 P8.28 P8.29 P8.30 P8.31 P8.32 P8.33 P8.34 P8.35 P8.36 P8.37 P8.38 P8.39 P8.40 P8.41 P8.42 P8.43 P8.44 P8.45 P8.46 P9.27 P9.28 P9.29 P9.30 P9.31 P9.32 P9.33 P9.34 P9.35 P9.36 P9.38 P9.39 P9.41 P9.43 P9.45 P9.46 U1B.4 U1B.8 U1B.13 U1B.15 U1C.2 U1C.3 U1C.9 U1C.12 U2.7 U5.4

## Polygon pours and split planes (outlines as drawn)
GND on Bottom Layer "GND_L02_P013" (solid, pour order 13): 19.68,19.67 19.68,2129.9 3326.77,2129.9 3326.77,19.67
GND on Top Layer "GND_L01_P014" (solid, pour order 14): 19.68,19.67 19.68,2129.9 3326.77,2129.9 3326.77,19.67

## Other copper
Multi-Layer:
  pour cut-out: 2353.2,1374.02 2353.2,1017.3 2238,1017.3 2238,1374.02
  pour cut-out: 2013.86,1374.02 2013.86,1017.3 1898.65,1017.3 1898.65,1374.02
  pour cut-out: 2013.86,1474.67 2013.86,1374.02 1457.98,1374.02 1457.98,1474.67
  pour cut-out: 2848.39,1760.91 2848.39,1646.73 2664.66,1646.73 2664.66,1760.91
  pour cut-out: 3166.62,1809.72 3166.62,1597.91 2848.39,1597.91 2848.39,1809.72
  pour cut-out: 2583.16,1703.82 2583.16,1375.64 2484.07,1375.64 2484.07,1703.82
  pour cut-out: 2583.16,1474.67 2583.16,1374.02 2238,1374.02 2238,1474.67
  pour cut-out: 1479.86,1325.06 1479.86,1189.15 1420.81,1189.15 1420.81,1325.06
  pour cut-out: 1506.24,1189.15 1506.24,1083.24 1394.43,1083.24 1394.43,1189.15
  pour cut-out: 1462.63,1385.51 1462.63,1325.06 1420.81,1325.06 1420.81,1385.51

## Silkscreen, mask and mechanical layers (free items; w line width, h text height)
Top Overlay:
  text "20k" at 2472.44,2110.24 h19.68
  text "GAIN" at 2562.99,2110.24 h19.68
  text "2k" at 2680.41,2110.24 h19.68
  text "GND" at 1272.66,2003.19 h19.68
  text "-2.5V" at 1041.95,1826.46 h19.68
  text "+3.3V" at 2080.92,1751.24 h19.68
  text "LNA_O_N" at 3183.66,1742.35 h19.68
  text "+3.3V" at 1425.2,1656.03 h19.68
  text "LNA_O_P" at 3183.66,1646.29 h19.68
  text "-5V" at 587.02,1582.82 h19.68
  text "OFF" at 1191.34,1523.93 h19.68 r270
  text "ALC = ON" at 1191.34,1411.98 h19.68 r270
  text "+5V" at 292.62,1410.63 h19.68
  text "K" at 1716.54,1228.35 h31.5
  text "A" at 1918.5,1228.35 h31.5
  text "A" at 2312.99,1228.35 h31.5
  text "K" at 2512.78,1228.35 h31.5
  text "OFF" at 2851.23,1224.29 h19.68 r270
  text "LNA_OUT" at 1523.94,1146.87 h19.68
  text "ALC = ON" at 2851.23,1121.57 h19.68 r270
  text "SINGLE" at 1523.94,1107.92 h19.68
  text "V_COM_MODE" at 962.05,1000.2 h19.68
  text "-2.5V" at 1778.85,869.15 h19.68
  text "-5V" at 1995.87,869.15 h19.68
  text "-2.5V" at 2172.12,869.15 h19.68
  text "-5V" at 2389.13,869.15 h19.68
  text "GND" at 1905.09,780.22 h19.68
  text "GND" at 2298.35,780.22 h19.68
  text "SINGLE" at 2669.53,745.54 h19.68
  text "ENDED" at 2669.53,715.81 h19.68
  text "HPF_OUT_2" at 2755.91,670.7 h19.68
  text "AGG_IN_N" at 2669.53,633.86 h19.68
  text "HPF_IN_2" at 3164.88,631.79 h19.68
  text "LPF_OUT" at 600.33,597.05 h19.68
  text "LPF_IN" at 747.76,597.05 h19.68
  text "AGC_IN_P" at 2669.52,531.5 h19.68
  text "HPF_IN_1" at 3164.88,525.61 h19.68
  text "HPF_OUT_1" at 2755.91,493.54 h19.68
  text "ADC_IN" at 608.72,340.55 h19.68
  text "GAIN_OUT" at 736.22,340.55 h19.68
  text "AGC_SET" at 1794.79,269.32 h19.68
  text "+5V" at 1000.99,233.77 h19.68
  text "GND" at 1206.06,195.02 h19.68 r270
  text "OpenVLC_RX_2.5_A" at 2269.33,174.26 h31.5
  text "IMDEA Networks" at 2269.33,117.89 h31.5
  text "Integrated ambient light cancellation" at 1948.82,71.33 h31.5
Bottom Overlay:
  text "GND" at 480.71,1275.59 h19.68 r270
Mechanical 1:
  the board outline again, w10

## Text inside footprints (layer, text, board x,y; h text height)
C2: Top Overlay "+" at 373.46,971.39 h47.24
C11: Top Overlay "+" at 230.15,1804.91 h47.24 r90
C12: Top Overlay "+" at 816.18,1878.13 h47.24 r90